# Altium PCB ciclo_V2.PcbDoc
Units mil, origin at the board's own origin, x right, y up, seen from the top; angles counter-clockwise.
Board outline 4195 x 3565 mil, 2 copper layers (Top Layer, Bottom Layer); 25 components, 22 nets, 104 pads, 110 vias.
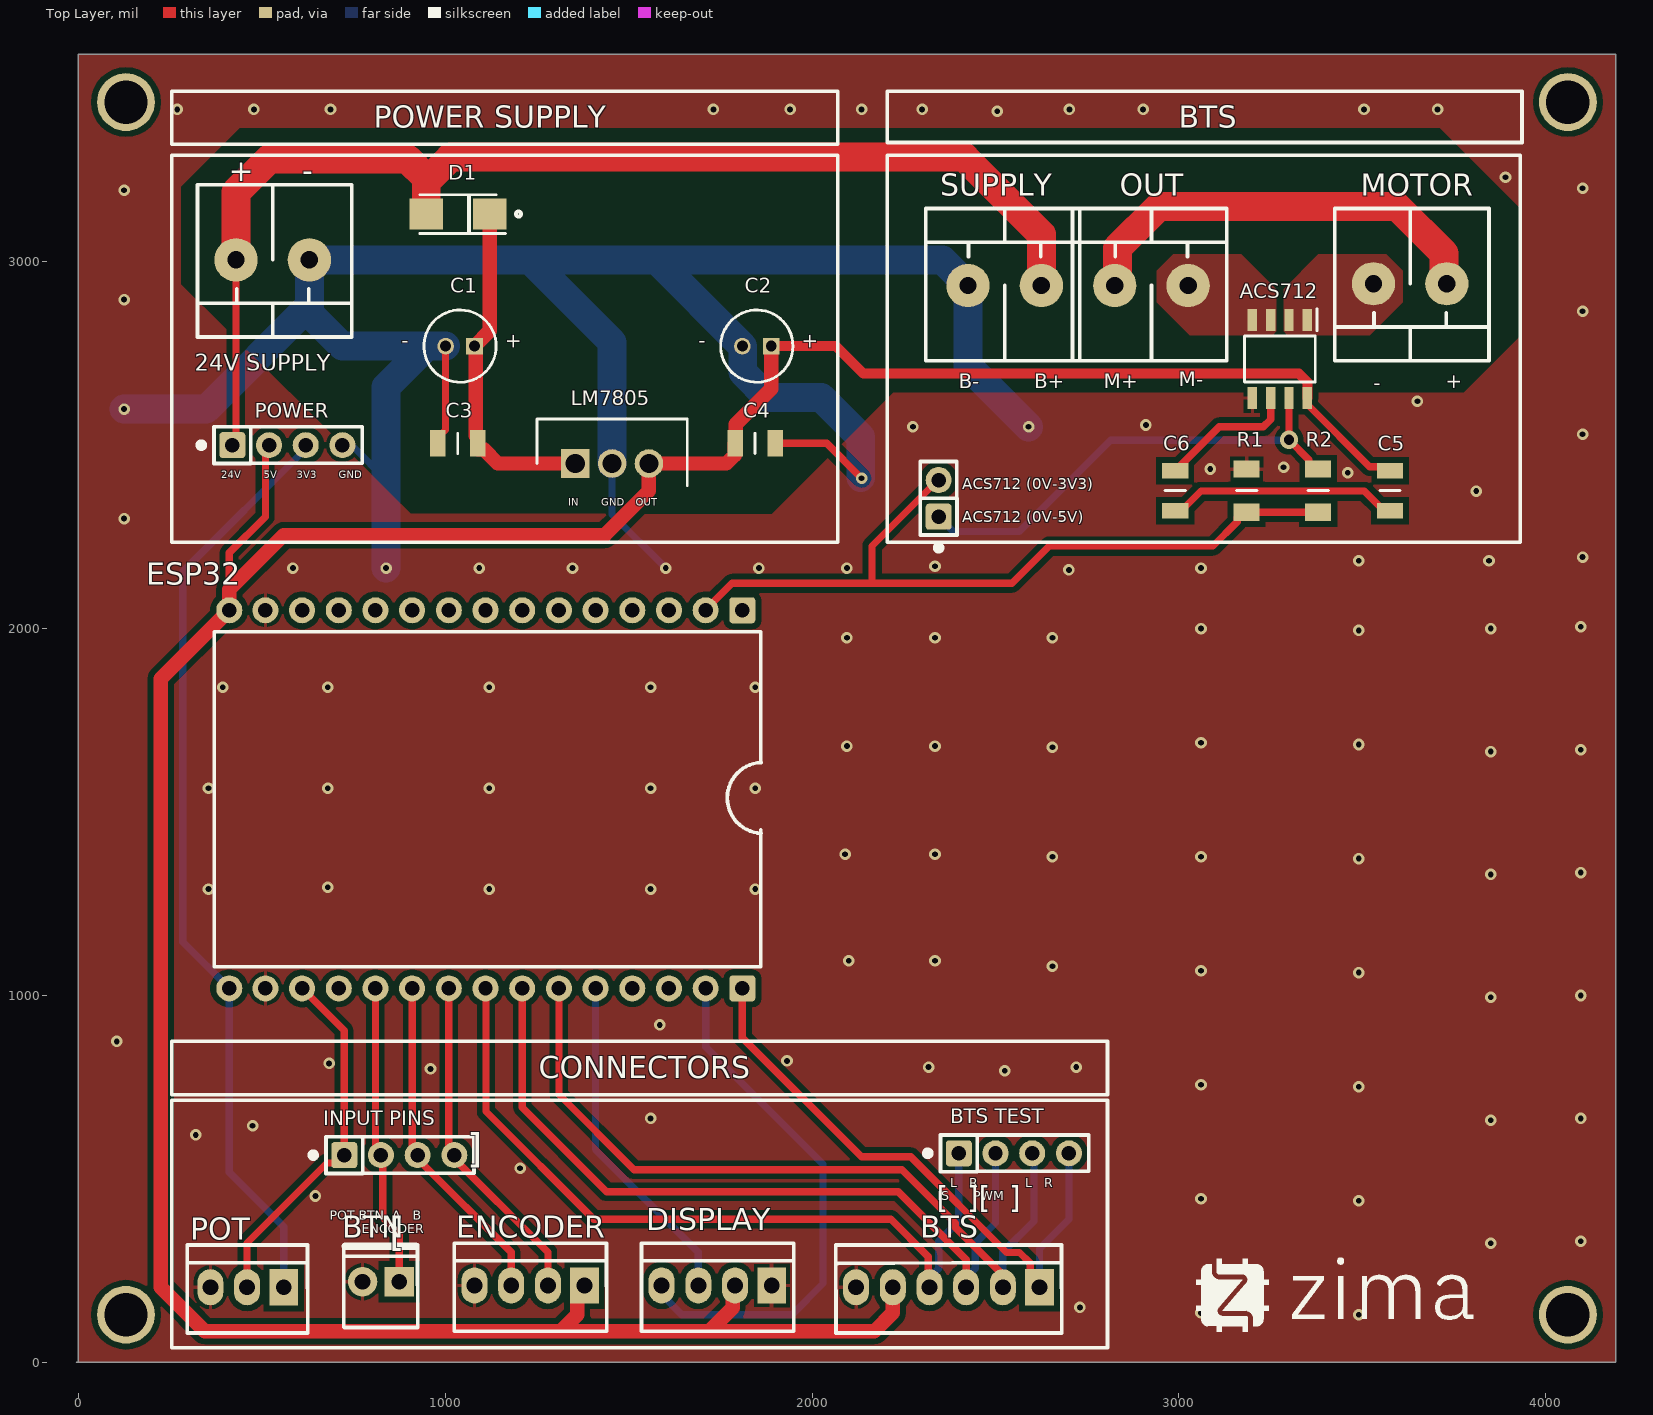
[diagram p0: Top Layer view]
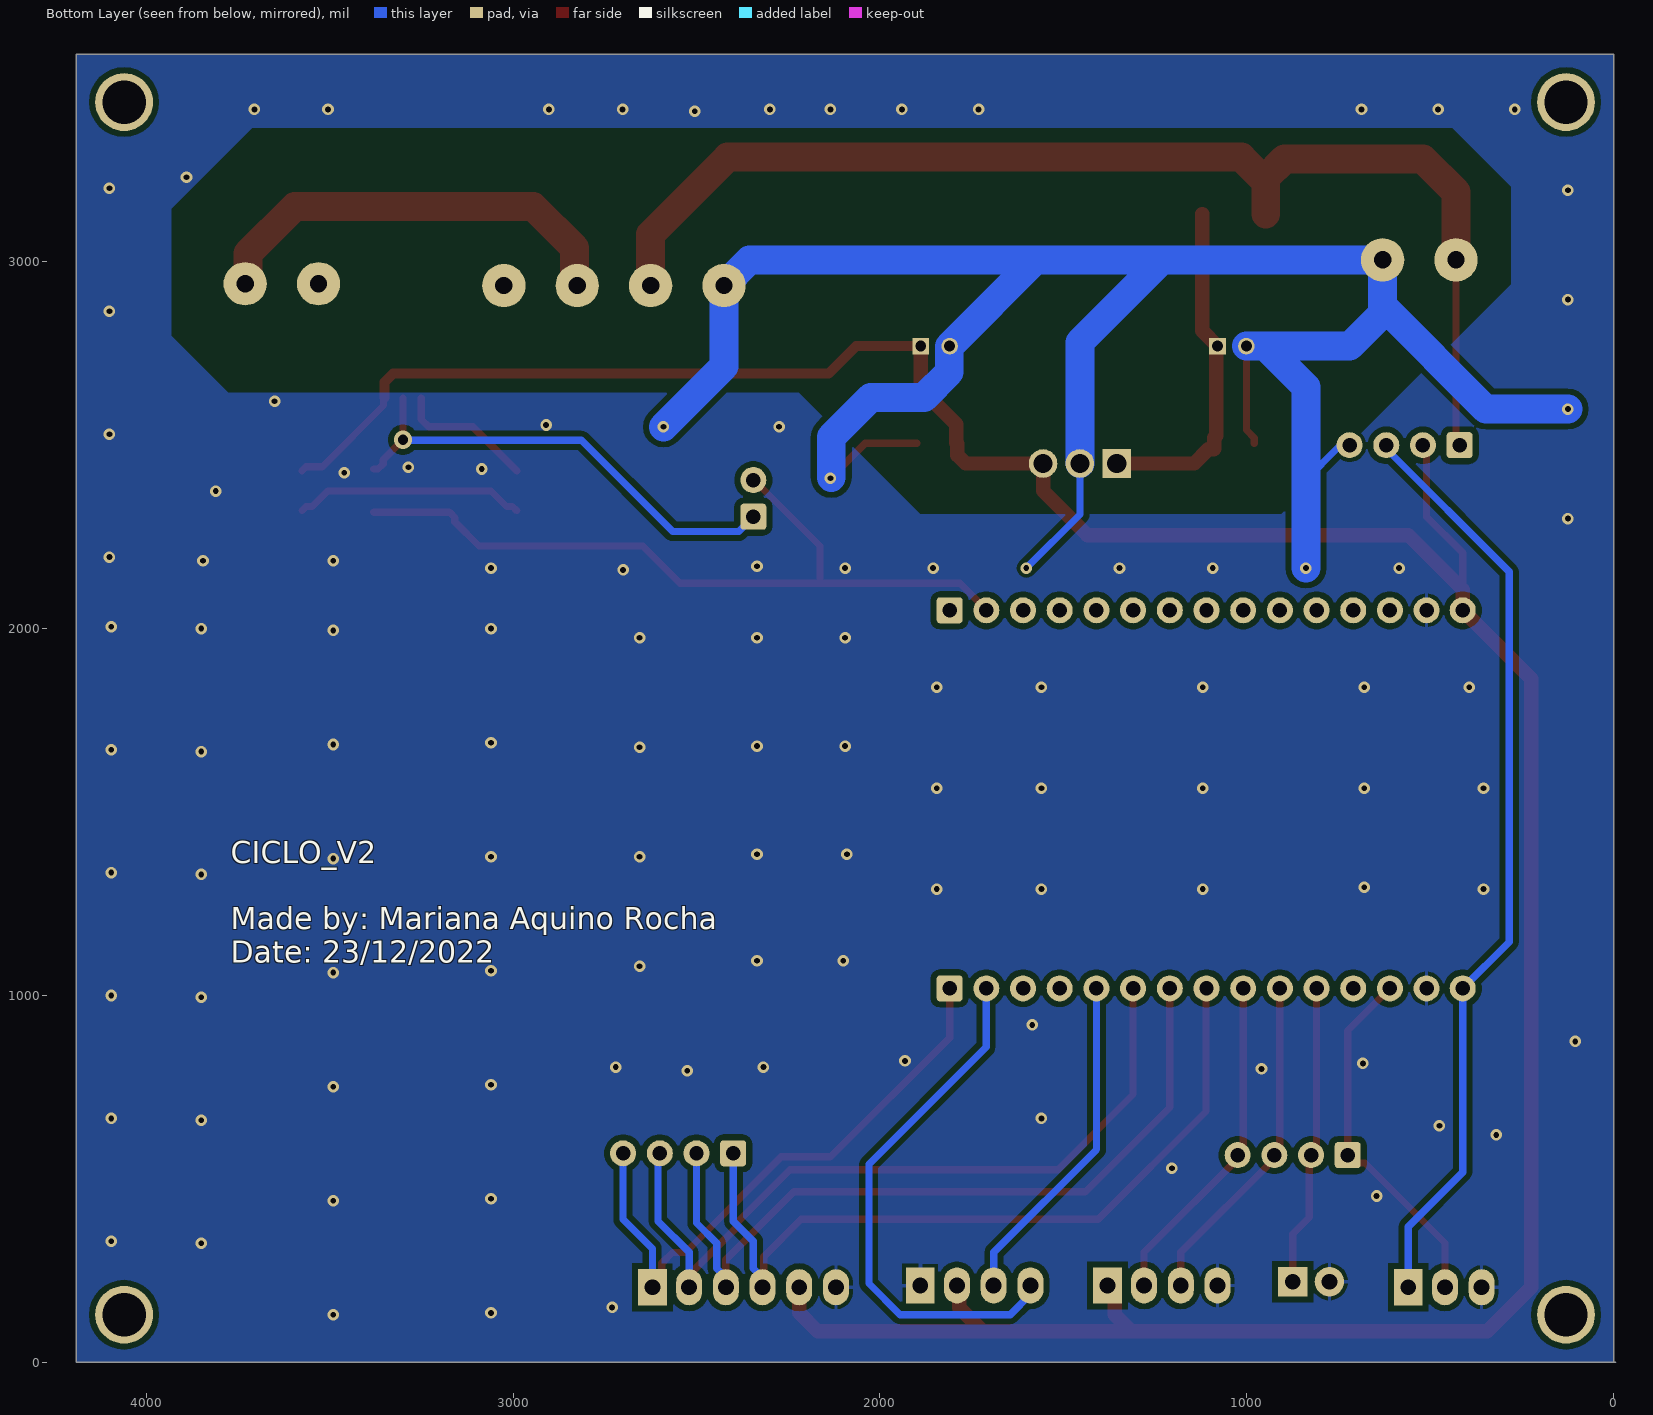
[diagram p1: Bottom Layer view, seen from below]

## Layer stack, top to bottom
Top Solder: solder mask 0.4, Solder Resist, Dk 3.5
Top Layer: signal copper 1.4
Dielectric 1: dielectric 12.6, FR-4, Dk 4.8
Bottom Layer: signal copper 1.4
Bottom Solder: solder mask 0.4, Solder Resist, Dk 3.5

## Board outline
0,0 0,3565 4190,3565 4190,0 -5,0

## Design rules (kind name [scope] priority, off if disabled: settings)
Clearance [All] p1: gap=15.75 ignorepadtopadclearanceinfootprint=FALSE
ComponentClearance [All] p1: gap=0 collisioncheckmode=3 verticalgap=0 showdistances=FALSE
HoleSize [All] p1: absolutevalues=TRUE maxlimit=1000 minlimit=1 maxpercent=80.000 minpercent=20.000
MinimumSolderMaskSliver [All] p1: minsoldermaskwidth=11.81
PlaneConnect PlaneConnect_1 [All] p1: planeconnectstyle=Relief reliefexpansion=20 reliefentries=4 reliefconductorwidth=10 reliefairgap=10
PolygonConnect PolygonConnect_4 [InNet('m-1') vs InNet('m-1')] p1: connectstyle=Direct reliefconductorwidth=10 reliefentries=4 polygonreliefangle="90 Angle" airgapwidth=10
PolygonConnect PolygonConnect_3 [InNet('m-2') vs InNet('m-2')] p2: connectstyle=Direct reliefconductorwidth=10 reliefentries=4 polygonreliefangle="90 Angle" airgapwidth=10
PolygonConnect PolygonConnect_2 [All] p3: connectstyle=Relief reliefconductorwidth=10 reliefentries=4 polygonreliefangle="90 Angle" airgapwidth=10
PolygonConnect PolygonConnect_1 [All vs InNet('GND')] p4: thpad.connectstyle=Relief thpad.reliefconductorwidth=10 thpad.reliefentries=4 thpad.polygonreliefangle="45 Angle" thpad.airgapwidth=10 smdpad.connectstyle=Relief smdpad.reliefconductorwidth=10 smdpad.reliefentries=4 smdpad.polygonreliefangle="90 Angle" smdpad.airgapwidth=10 via.connectstyle=Relief via.reliefconductorwidth=10 via.reliefentries=4 via.polygonreliefangle="45 Angle" via.airgapwidth=10
RoutingVias [All] p1: holewidth=28 width=50 viastyle="Through Hole" minholewidth=28 minwidth=50 maxholewidth=28 maxwidth=50
SilkToSilkClearance [All] p1: silktosilkclearance=0
SilkToSolderMaskClearance [IsPad] p1: minsilkscreentomaskgap=0 clearancetoexposedcopper=TRUE
SolderMaskExpansion [All] p1: expansion=4 istentingtop=FALSE
Width [All] p1: maxlimit=78.74 minlimit=19.68 preferedwidth=19.68 minimp=50.000000 maximp=50.000000 favimp=50.000000
24 further rules are at their usual default settings.

## Classes and differential pairs
component class ciclo_V2: "24V SUPPLY" ACS712 BTN "BTS TEST" C1 C2 C3 C4 C5 C6 D1 DISPLAY ENCODER ESP32 "INPUT PINS" LM7805 MOTOR OUT POT POWER R1 R2 SUPPLY

## Components (designator, comment, footprint, x,y, rotation, side; value= is the part's Value field where it differs from the comment)
"24V SUPPLY" "KRE2vias" KRE2-2vias 530,3005 r0 top
ACS712 "ACS712" SOIC127P600X175-8N 3275,2735 r270 top
BTN "KK_2.54_2vias" KK_2VIAS_180 875,220 r180 top (schematic designator BOTAO)
BTS "KK_2.54_6vias" KK_6vias_180 2620,205 r180 top (schematic designator PONTE_H_PINS)
"BTS TEST" "Testing PADS 1x4" "Testing PADS 1x4" 2400.39,567.05 r0 top
C1 "220uF" CAPPRD200W55D500H1200 1080,2770 r180 top
C2 "220uF" CAPPRD200W55D500H1200 1888.74,2770 r180 top
C3 "0.1uF" CAPC3216X180N 1034.33,2505 r180 top
C4 "0.1uF" CAPC3216X180N 1845,2505 r0 top
C5 "100nf" CAPC3216X180N 3575,2375.94 r90 top
C6 "1nf" CAPC3216X180N 2990,2375.94 r270 top
CURRENT "Testing PADS 1x2" "Testing PADS 1x2" 2347.95,2305.39 r90 top
D1 "1N4007 smd" DIOM5327X242N 1035,3130 r180 top
DISPLAY "KK_2.54_4vias" KK_4vias_180 1890,210 r180 top
ENCODER "KK_2.54_4vias" KK_4vias_180 1380,210 r180 top
ESP32 "microcontrolador" ESP32_Desvikit_v1 1810,2050 r270 top value="ESP32 Desvikit V1"
"INPUT PINS" "Testing PADS 1x4" "Testing PADS 1x4" 725.39,562.05 r0 top (schematic designator OTHER)
LM7805 "L7805CV" TO255P460X1020X2008-3P 1354.61,2450 r0 top
MOTOR "KRE2vias" KRE2-2vias 3630,2940 r0 top
OUT "KRE2vias" KRE2-2vias 2925,2935 r180 top (schematic designator PHASE)
POT "KK_2.54_3vias" KK_3vias_180 560,205 r180 top (schematic designator POTENCIOMETRO)
POWER "Testing PADS 1x4" "Testing PADS 1x4" 420.39,2497.05 r0 top
R1 "2k" RESC3216X75N 3184.61,2375.94 r90 top
R2 "1k" RESC3216X75N 3379.61,2375.94 r270 top
SUPPLY "KRE2vias" KRE2-2vias 2525,2935 r180 top (schematic designator BTS)

## Footprints (in the part's own frame and the unit in brackets; to place one, negate y for a bottom-side part, rotate by r counter-clockwise, add the part's x,y. Pads: shape width x height; smd on the part's side, far side on the other; paste and mask are expansions set on the pad)
CAPC3216X180N [mm]
  rect 1.07x1.82 smd: 1(-1.38,0) 2(1.38,0)
  silkscreen extent 0,-0.7 0,0.7, body extent -1.6,-0.8 1.6,0.8, height 1.8
CAPPRD200W55D500H1200 [mm]
  rect 1.15x1.15 hole 0.75: 1(0,0)
  round 1.15 hole 0.75: 2(2,0)
  silkscreen extent -1.5,-2.5 3.5,2.5, body extent -1.75,-2.75 3.75,2.75, height 12
DIOM5327X242N [mm]
  rect 2.3x2.15 smd: 1(-2.2,0) 2(2.2,0)
  silkscreen extent -3.27,-1.34 2.65,1.34, body extent -2.65,-1.34 2.65,1.34, height 2.42
ESP32_Desvikit_v1 [mm]
  rrect25% 1.8x1.8 hole 1: 1(0,0) 30(26.175,0)
  round 1.8 hole 1: 2(0,-2.54) 3(0,-5.08) 4(0,-7.62) 5(0,-10.16) 6(0,-12.7) 7(0,-15.24) 8(0,-17.78) 9(0,-20.32) 10(0,-22.86) 11(0,-25.4) 12(0,-27.94) 13(0,-30.48) 14(0,-33.02) 15(0,-35.52) 16(26.175,-35.52) 17(26.175,-33.02) 18(26.175,-30.48) 19(26.175,-27.94) 20(26.175,-25.4) 21(26.175,-22.86) 22(26.175,-20.32) 23(26.175,-17.78) 24(26.175,-15.24) 25(26.175,-12.7) 26(26.175,-10.16) 27(26.175,-7.62) 28(26.175,-5.08) 29(26.175,-2.54)
  silkscreen extent 1.47,-36.57 24.69,1.31, body extent -1.2,-46.03 27.4,4.9, height 15.1
KK_2VIAS_180 [mil]
  rect 80x80 hole 43.31: 1(0,0)
  round 80 hole 43.31: 2(100,0)
  silkscreen extent -50,-101 151,125, body extent -61,-108 165,128, height 468
KK_3vias_180 [mm]
  rect 2x2.5 hole 1.1: 1(0,0)
  oval 1.8x2.5 hole 1.1: 2(2.54,0) 3(5.08,0)
  silkscreen extent -1.65,-2.92 6.69,3.18, body extent -1.6,-2.95 6.69,3.05, height 11.9
KK_4vias_180 [mm]
  rect 2x2.5 hole 1.1: 1(0,0)
  oval 1.8x2.5 hole 1.1: 2(2.54,0) 3(5.08,0) 4(7.62,0)
  silkscreen extent -1.53,-2.92 9.02,3.18, body extent -1.4,-2.79 8.76,3.01, height 11.72
KK_6vias_180 [mm]
  rect 2x2.5 hole 1.1: 1(0,0)
  oval 1.8x2.5 hole 1.1: 2(2.54,0) 3(5.08,0) 4(7.62,0) 5(10.16,0) 6(12.7,0)
  silkscreen extent -1.53,-2.92 14.11,3.18, body extent -1.4,-2.79 13.84,3.05, height 11.7
KRE2-2vias [mm]
  round 3 hole 1.2: 1(-2.54,0) 2(2.54,0)
  silkscreen extent -5.21,-5.33 5.46,5.21, body extent -5.13,-5.33 5.63,5.17, height 14.35
RESC3216X75N [mm]
  rect 1.2x1.8 smd: 1(-1.5,0) 2(1.5,0)
  silkscreen extent 0,-0.7 0,0.7, body extent -1.6,-0.8 1.6,0.8, height 0.75
SOIC127P600X175-8N [mm]
  rect 1.525x0.65 smd: 1(-2.712,1.905) 2(-2.712,0.635) 3(-2.712,-0.635) 4(-2.712,-1.905) 5(2.712,-1.905) 6(2.712,-0.635) 7(2.712,0.635) 8(2.712,1.905)
  silkscreen extent -3.47,-2.45 1.6,2.58, body extent -3,-2.45 3,2.45, height 1.75
"Testing PADS 1x2" [mm]
  rrect25% 1.8x1.8 hole 1: 1(-0.01,0.075)
  round 1.8 hole 1: 2(2.53,0.075)
  silkscreen extent -2.31,-1.2 3.81,1.34
"Testing PADS 1x4" [mm]
  rrect25% 1.8x1.8 hole 1: 1(-0.01,0.075)
  round 1.8 hole 1: 2(2.53,0.075) 3(5.07,0.075) 4(7.61,0.075)
  silkscreen extent -2.31,-1.2 8.98,1.34
TO255P460X1020X2008-3P [mm]
  rect 1.98x1.98 hole 1.32: 1(0,0)
  round 1.98 hole 1.32: 2(2.55,0) 3(5.1,0)
  silkscreen extent -2.65,-1.53 7.75,3.07, body extent -2.55,-1.53 7.65,3.07, height 19.21

## Part data
"24V SUPPLY" MOTOR OUT SUPPLY: "Conector 2 vias", DescriÃ§Ã£o="Conector KRE 2 vias 180Âº", Encapsulamento="PTH - 180Âº", Modelo="2 vias - 180Âº"
ACS712: "Sensor de corrente 20A", Manufacturer_Name="Sharp Microelectronics", Manufacturer_Part_Number=ACS712ELCTR-05B-T, Datasheet Link=https://www.allegromicro.com/~/media/Files/Datasheets/ACS712-Datasheet.ashx, Height=1.75mm
BTN: "Conector KK 2.54mm 2 vias", DescriÃ§Ã£o="Conector KK 3 vias com passo 2.54mm", Encapsulamento="PTH - 180Âº", Modelo="2 vias - 180Âº", Valor="KK 2 vias 180Âº"
BTS: "Conector KK 2.54mm 6 vias", DescriÃ§Ã£o="Conector KK 3 vias com passo 2.54mm", Encapsulamento="PTH - 180Âº", Modelo="3 vias - 180Âº", Valor="KK 6 vias 180Âº"
"BTS TEST" CURRENT "INPUT PINS" POWER: "Headers & Wire Housings 40Pin 2mm Spacing Single Row Hdrs, 5pc", Manufacturer=Cromax, Manufacturer Part Number=-, Accessory Type=-, Brand=Cromax, Category="Headers & Wire Housings", ComponentLink1Description=-, ComponentLink1URL=-, Contact Gender="Pin (Female)", Contact Plating=Gold, Contact Type=-, Minimum Order Quantity=1, Mounting Angle=Vertical, Mounting Style="Straight Pin", Number of Positions="40 Position", Number of Rows="1 Row", Pitch="2 mm", Pricing 1="1=1.60, 2=0.80 (BRL)", Product=Headers, Product Category=Accessories, Reeling=False, RoHS="RoHS Compliant", RoHS - Mouser=Y, Row Spacing=-, Stock 1=14, Supplier 1=-, Supplier Part Number 1=-, Termination Style="Through Hole", Type=Breakaway
C1 C2: library part "Capacitor eletrolÃ­tico D5mm", "Capacitor Polarised", Arrow Part Number=ECA-0JM221, Manufacturer_Name=Panasonic, Mouser Part Number=667-ECA-0JM221, Arrow Price/Stock=https://www.arrow.com/en/products/eca-0jm221/panasonic, Datasheet Link=http://industrial.panasonic.com/cdbs/www-data/pdf/RDF0000/ABA0000C1218.pdf, Height=12mm, Manufacturer_Part_Number=ECA-0JM221, Mouser Price/Stock=https://www.mouser.com/Search/Refine.aspx?Keyword=667-ECA-0JM221
C3 C4 C5 C6: library part GRM31CC80E227ME11L, "Capacitor cerÃ¢mico SMD", Manufacturer_Name="Murata Electronics", Mouser Part Number=81-GRM31CC80E227ME1L, Arrow Part Number=GRM31CC80E227ME11L, Arrow Price/Stock=https://www.arrow.com/en/products/grm31cc80e227me11l/murata-manufacturing, Datasheet Link=https://datasheet.datasheetarchive.com/originals/distributors/DKDS-10/192368.pdf, Height=1.8mm, Manufacturer_Part_Number=GRM31CC80E227ME11L, Mouser Price/Stock=https://www.mouser.com/Search/Refine.aspx?Keyword=81-GRM31CC80E227ME1L
D1: "Diode smd", Manufacturer_Name=Shikues, Manufacturer_Part_Number=1N4007, Datasheet Link=https://datasheet.lcsc.com/szlcsc/SK-1N4007_C126233.pdf, Height=2.42mm
DISPLAY ENCODER: "Conector KK 2.54mm 4 vias", DescriÃ§Ã£o="Conector KK 3 vias com passo 2.54mm", Encapsulamento="PTH - 180Âº", Modelo="3 vias - 180Âº", Valor="KK 4 vias 180Âº"
ESP32: library part "ESP32 Desvikit v1", "microcontrolador com modulo bluetooth e wifi"
LM7805: "Regulador de tensÃ£o para 5V", Manufacturer_Name=STMicroelectronics, Mouser Part Number=511-L7805CV, Arrow Part Number=L7805CV, Arrow Price/Stock=https://www.arrow.com/en/products/l7805cv/stmicroelectronics?region=europe, Datasheet Link=http://www.st.com/web/en/resource/technical/document/datasheet/CD00000444.pdf, Height=4.6mm, Manufacturer_Part_Number=L7805CV, Mouser Price/Stock=https://www.mouser.co.uk/ProductDetail/STMicroelectronics/L7805CV?qs=9NrABl3fj%2FqplZAHiYUxWg%3D%3D
POT: "Conector KK 2.54mm 3 vias", DescriÃ§Ã£o="Conector KK 3 vias com passo 2.54mm", Encapsulamento="PTH - 180Âº", Modelo="3 vias - 180Âº", Valor="KK 3 vias 180Âº"
R1 R2: library part CR1206, "Resistor SMD 1206", Manufacturer_Name=Bourns, Manufacturer_Part_Number=CR1206-F/-2R00ELF, Mouser Part Number=652-CR1206-F/2R00ELF, Height=0.75mm, Mouser Price/Stock=https://www.mouser.co.uk/ProductDetail/Bourns/CR1206-F-2R00ELF?qs=W%2FMpXkg%252BdQ47Z%2FeZv1nDSg%3D%3D

## Free pads (board coordinates)
  round 157.48 hole 118.11: 1(130,130) 1(4060,130) 17(130,3435) 17(4060,3435)

## Via types
v1: diameter 31.5, hole 15.75, Top Layer to Bottom Layer, tented both sides, 109 vias
v2: diameter 50, hole 28, Top Layer to Bottom Layer, 1 vias

## Nets (pads, with @x,y where several pads share a name; then routed paths per layer and width w, separated by ;. In a path a pad name is that pad's centre, name@x,y a point inside that pad or via, vN(x,y) a via of type N, cw(c..) or ccw(c..) an arc to the next point about the centre after c; other vN are vias at no path point)
+5: ACS712.8 BTS.5 C2.1 C4.1 C5.2 DISPLAY.2 ENCODER.1 ESP32.15 LM7805.3 POWER.2 | length 8619.3
  Top Layer w19.68: 411.57,2106.57 411.57,2206.57 510,2305 510,2462.88 510.21,2463.09 510.21,2490.21 POWER.2 ; ACS712.8 3352.95,2625.28 3352.95,2608.05 3519.51,2441.5 3563.78,2441.5 C5.2
  Top Layer w27.56: C2.1 2065,2770 2140,2695 3326.94,2695 3350,2671.94 ACS712.8
  Top Layer w39.37: ENCODER.1@1380,191.88 1371.72,191.88 1360.32,180.47 1360.32,130.32 1315,85 ; DISPLAY.2 1783.97,203.97 1783.97,148.97 1720,85 ; C2.1 1888.74,2653.74 1792.05,2557.05 1792.05,2506.38 C4.1 1789.29,2503.62 1789.29,2473.06 1766.23,2450 LM7805.3 1555.39,2375.39 1435,2255 560,2255 411.57,2106.57 ESP32.15 225,1863.43 225,205 345,85 1315,85 ; BTS.5 2220,135 2170,85 1720,85 ; 1315,85 1720,85
+24: "24V SUPPLY.1" D1.2 POWER.1 SUPPLY.1 | length 3314.3
  Top Layer w19.68: POWER.1@400,2495 400,2503.2 430,2533.2 430,3005
  Top Layer w78.74: 430,3005 430,3190 520,3280 897.26,3280 948.39,3228.88 D1.2 ; 948.39,3218.39 1015,3285 2415,3285 2625,3075 SUPPLY.1
acs_out: ACS712.7 CURRENT.1 R2.1 | length 1308.1
  Top Layer w19.68: ACS712.7 v2(3300,2514.61) 3354.02,2460.59 3354.02,2448.78 3367.8,2435 R2.1
  Bottom Layer w19.68: CURRENT.1 2385,2265 2565,2265 2813.43,2513.43 3298.83,2513.43 v2(3300,2514.61)
botao: "INPUT PINS.2" BTN.1 ESP32.20 | length 818.1
  Top Layer w19.68: 810,550 ESP32.20 ; 830,550 830,395 875,350 BTN.1
corrente: CURRENT.2 ESP32.2 R1.1 R2.2 | length 2145.8
  Top Layer w19.68: ESP32.2 1710,2051.87 1781.79,2123.66 2163.5,2123.66 ; CURRENT.2 2343.13,2405 2163.5,2225.36 2163.5,2123.66 ; R2.2 3172.8,2316.89 3159.02,2303.11 3159.02,2291.3 3092.72,2225 2646.54,2225 2545.2,2123.66 2163.5,2123.66
encoder_a: "INPUT PINS.4" ENCODER.2 ESP32.22 | length 921.3
  Top Layer w19.68: ESP32.22 1010,570 1280,300 ENCODER.2
encoder_b: "INPUT PINS.3" ENCODER.3 ESP32.21 | length 915.5
  Top Layer w19.68: ESP32.21 910,590 940,560 ; 930,550 1180,300 ENCODER.3
GND: "24V SUPPLY.2" ACS712.5 BTN.2 BTS.6 C1.2 C2.2 C3.2 C4.2 DISPLAY.1 ENCODER.4 ESP32.14 ESP32.17 LM7805.2 POT.3 POWER.4 R1.2 SUPPLY.2 | length 6680.6
  Top Layer w19.68: C3.2 980,2519.76 1001.26,2541.02 C1.2 ; C4.2 2040,2505 v1(2135,2410)
  Bottom Layer w19.68: POWER.4@750,2495 839,2406 ; LM7805.2 1455,2311 v1(1601,2165)
  Bottom Layer w78.74: v1(125,2598.33) 348.33,2598.33 630,2880 ; v1(839,2165) 839,2406 839,2659 950,2770 ; C1.2 950,2770 ; LM7805.2 1455,2780 1230,3005 ; v1@2132.74,2412.26 2132.74,2522.26 2025,2630 1880,2630 1810.98,2699.02 1810.98,2769.02 1575,3005 ; v1(2590,2550) 2425,2715 SUPPLY.2 2355,3005 1575,3005 ; 950,2770 720,2770 630,2860 630,3005 1230,3005 ; 1230,3005 1575,3005
  other v1: 3490,130 3060,135 2730,150 3850,325 4095,330 3490,440.83 3060,445.83 646.44,453.56 1204.23,529.23 320,620 475,645 3850,660 1560,665 4095,665 3490,751.67 3060,756.67 2525,795 960,800 2317.5,805 2720,805 683.66,815 1931.73,821.73 105,875 1585,920 3850,995 4095,1000 3490,1062.5 3060,1067.5 2655,1080 2100,1095 2335,1095 355,1290 1120,1290 1560,1290 1845,1290 680,1295 3850,1330 4095,1335 3490,1373.33 2655,1378.33 3060,1378.33 2090,1385 2335,1385 355,1565 680,1565 1120,1565 1560,1565 1845,1565 3850,1665 4095,1670 2655,1676.67 2095,1680 2335,1680 3490,1684.17 3060,1689.17 393.98,1840 680,1840 1120,1840 1560,1840 1845,1840 2095,1975 2335,1975 2655,1975 3490,1995 3060,2000 3850,2000 4095,2005 2700,2160 585.02,2164.98 1093,2165 1347,2165 1855,2165 2095,2165 3060,2165 2335,2170 3490,2185 3845,2185 4100,2195 125,2300 3810,2375 3460,2425 3085,2435 3285,2440 4100,2530 2275,2550 2910,2555 3650,2620 4100,2865 125,2896.67 125,3195 4100,3200 3890,3230 2505,3410 270,3415 478.75,3415 687.5,3415 1731.25,3415 1940,3415 2135,3415 2300,3415 2701.43,3415 2902.14,3415 3504.29,3415 3705,3415
l_is: "BTS TEST.1" BTS.4 ESP32.23 | length 2168.3
  Top Layer w19.68: ESP32.23 1111.26,1018.23 1111.26,683.74 1405,390 2215,390 2316.86,288.14 2316.86,228.14 BTS.4@2320,225
  Bottom Layer w19.68: BTS.4 2320,230.9 2345,255.9 2345,330 2400,385 2400,570
l_pwm: "BTS TEST.3" BTS.2 ESP32.25 | length 2105.6
  Top Layer w19.68: ESP32.25 1310,730 1515,525 2245,525 2390.05,379.95 2390.05,368.73 2520,238.78 BTS.2@2520,225
  Bottom Layer w19.68: BTS.2@2520,225 2520,300 2605,385 2605,565 2600,570
m+: MOTOR.2 OUT.2 | length 1180.6
  Top Layer w78.74: OUT.2 2832.53,2942.53 2832.53,3037.53 2945,3150 3595,3150 3722.47,3022.53 3722.47,2947.53 MOTOR.2
m-1: ACS712.1 ACS712.2 MOTOR.1
m-2: ACS712.3 ACS712.4 OUT.1
NetACS712_6: ACS712.6 C6.1 | length 376.1
  Top Layer w19.68: C6.1 3109.72,2550 3230,2550 3250,2570 ACS712.6
NetC1_1: C1.1 C3.1 D1.1 LM7805.1 | length 943.2
  Top Layer w39.37: D1.1 1121.61,2811.61 C1.1 1082.95,2767.05 1082.95,2525.47 1088.66,2519.76 1088.66,2490.24 1090.04,2488.86 1104.8,2488.86 1143.66,2450 LM7805.1
NetC5_1: C5.1 C6.2 | length 629.2
  Top Layer w19.68: C6.2 3001.22,2332.83 3017.83,2332.83 3060,2375 3505,2375 3547.17,2332.83 3563.78,2332.83 C5.1
POT: "INPUT PINS.1" ESP32.18 POT.2 | length 984.3
  Top Layer w19.68: POT.2 460,325.59 678.17,543.76 699.41,543.76 724.41,568.76 724.41,590 725,590.59 725,904.49 ESP32.18
r_is: "BTS TEST.2" BTS.3 ESP32.24 | length 2159.5
  Top Layer w19.68: ESP32.24 1210,695 1440,465 2235,465 2420,280 BTS.3@2420,225
  Bottom Layer w19.68: BTS.3 2420,230.9 2445,255.9 2445,325 2500,380 2500,570
r_pwm: "BTS TEST.4" BTS.1 ESP32.30 | length 1631.3
  Top Layer w19.68: ESP32.30 1810,885 2134.57,560.43 2269.06,560.43 2529.69,299.8 2565.2,299.8 2594.51,270.49 2594.51,244.37 2613.88,225 BTS.1@2620,225
  Bottom Layer w19.68: BTS.1 2620,310 2700,390 2700,570
SCL: DISPLAY.4 ESP32.29 | length 1460
  Bottom Layer w19.68: DISPLAY.4 1590,185 1645,130 1945,130 2030,215 2030,540 1710,860 ESP32.29
SDA: DISPLAY.3 ESP32.26 | length 925.5
  Bottom Layer w19.68: ESP32.26 1410,580 1690,300 DISPLAY.3
VDD33: ESP32.16 POT.1 POWER.3 | length 2544.7
  Bottom Layer w19.68: POT.1 560,370 411.57,518.43 ESP32.16 285,1146.06 285,2155 POWER.3@625,2495
pads on no net: ESP32.1 ESP32.3 ESP32.4 ESP32.5 ESP32.6 ESP32.7 ESP32.8 ESP32.9 ESP32.10 ESP32.11 ESP32.12 ESP32.13 ESP32.19 ESP32.27 ESP32.28

## Polygon pours and split planes (outlines as drawn)
GND on Top Layer "GND_L01_P016" (solid, pour order 16): 0,3565 0,0 4190,0 4190,3565
m-1 on Top Layer "M-1_L01_P000" (solid, pour order 0): 3295,2800 3285,2810 3285,2925 3380,3020 3565,3020 3610,2975 3610,2890 3520,2800
m-2 on Top Layer "M-2_L01_P002" (solid, pour order 2): 3255,2800 3265,2810 3265,2925 3170,3020 2985,3020 2940,2975 2940,2890 3030,2800
GND on Bottom Layer "GND_L02_P009" (solid, pour order 9): 0,3565 0,0 4190,0 4190,3565

## Other copper
Top Layer:
  pour cut-out: 3285,2643.76 3285,2810 3295,2800 3520,2800 3610,2890 3610,2975 3565,3020 3380,3020 3285,2925 3265,2925 3170,3020 2985,3020 2940,2975 2940,2890 3030,2800 3255,2800 3265,2810 3265,2643.76 2220.7,2643.76 1890.7,2313.76 905.7,2313.76 280.7,2938.76 280.7,3203.76 440.7,3363.76 3710.7,3363.76 3930.7,3143.76 3930.7,2798.61 3775.86,2643.76
Bottom Layer:
  pour cut-out: 3775.86,2643.76 3930.7,2798.61 3930.7,3143.76 3710.7,3363.76 440.7,3363.76 280.7,3203.76 280.7,2938.76 905.7,2313.76 1890.7,2313.76 2220.7,2643.76

## Silkscreen, mask and mechanical layers (free items; w line width, h text height)
Top Overlay:
  drawing of 33 lines, arcs and shapes, not listed
  text "POWER SUPPLY" at 805.11,3365 h60
  text "BTS" at 3000,3365 h60
  text "+" at 410,3220 h60
  text "-" at 610,3220.01 h60
  text "-" at 901.26,2794.99 h40 r180
  text "-" at 1710,2794.99 h40 r180
  text "+" at 1202.92,2760 h40 r90
  text "+" at 2011.66,2760 h40 r90
  text "-" at 3550,2679.99 h40 r180
  text "M-" at 3000,2660 h40
  text "B-" at 2400,2655 h40
  text "B+" at 2605,2655 h40
  text "M+" at 2795,2655 h40
  text "+" at 3766.66,2650 h40 r90
  text "24V" at 390,2410.01 h20
  text "5V" at 505,2410 h20
  text "3V3" at 595,2410 h20
  text "GND" at 710,2410 h20
  text "IN" at 1335,2335 h20
  text "GND" at 1425,2335 h20
  text "OUT" at 1520,2335 h20
  text "ACS712 (0V-3V3) /  / ACS712 (0V-5V)" at 2410,2290 h30
  text "CONNECTORS" at 1255,775 h60
  text "[" at 1102.5,613.54 h80 r180
  text "L   R" at 2376.25,477.01 h25
  text "L   R" at 2580.62,477.01 h25
  text "IS      PWM" at 2342.5,442.01 h25
  text "[  ][  ]" at 2340,420 h60
  text "POT BTN  A   B  /         ENCODER" at 685,351.68 h25
  text "[" at 847.5,316.46 h80
Bottom Overlay:
  text "CICLO_V2 /  / Made by: Mariana Aquino Rocha / Date: 23/12/2022" at 3770,1090 h60